# EAGLE board Traffic_Light_PCB (EAGLE 8.1.1)
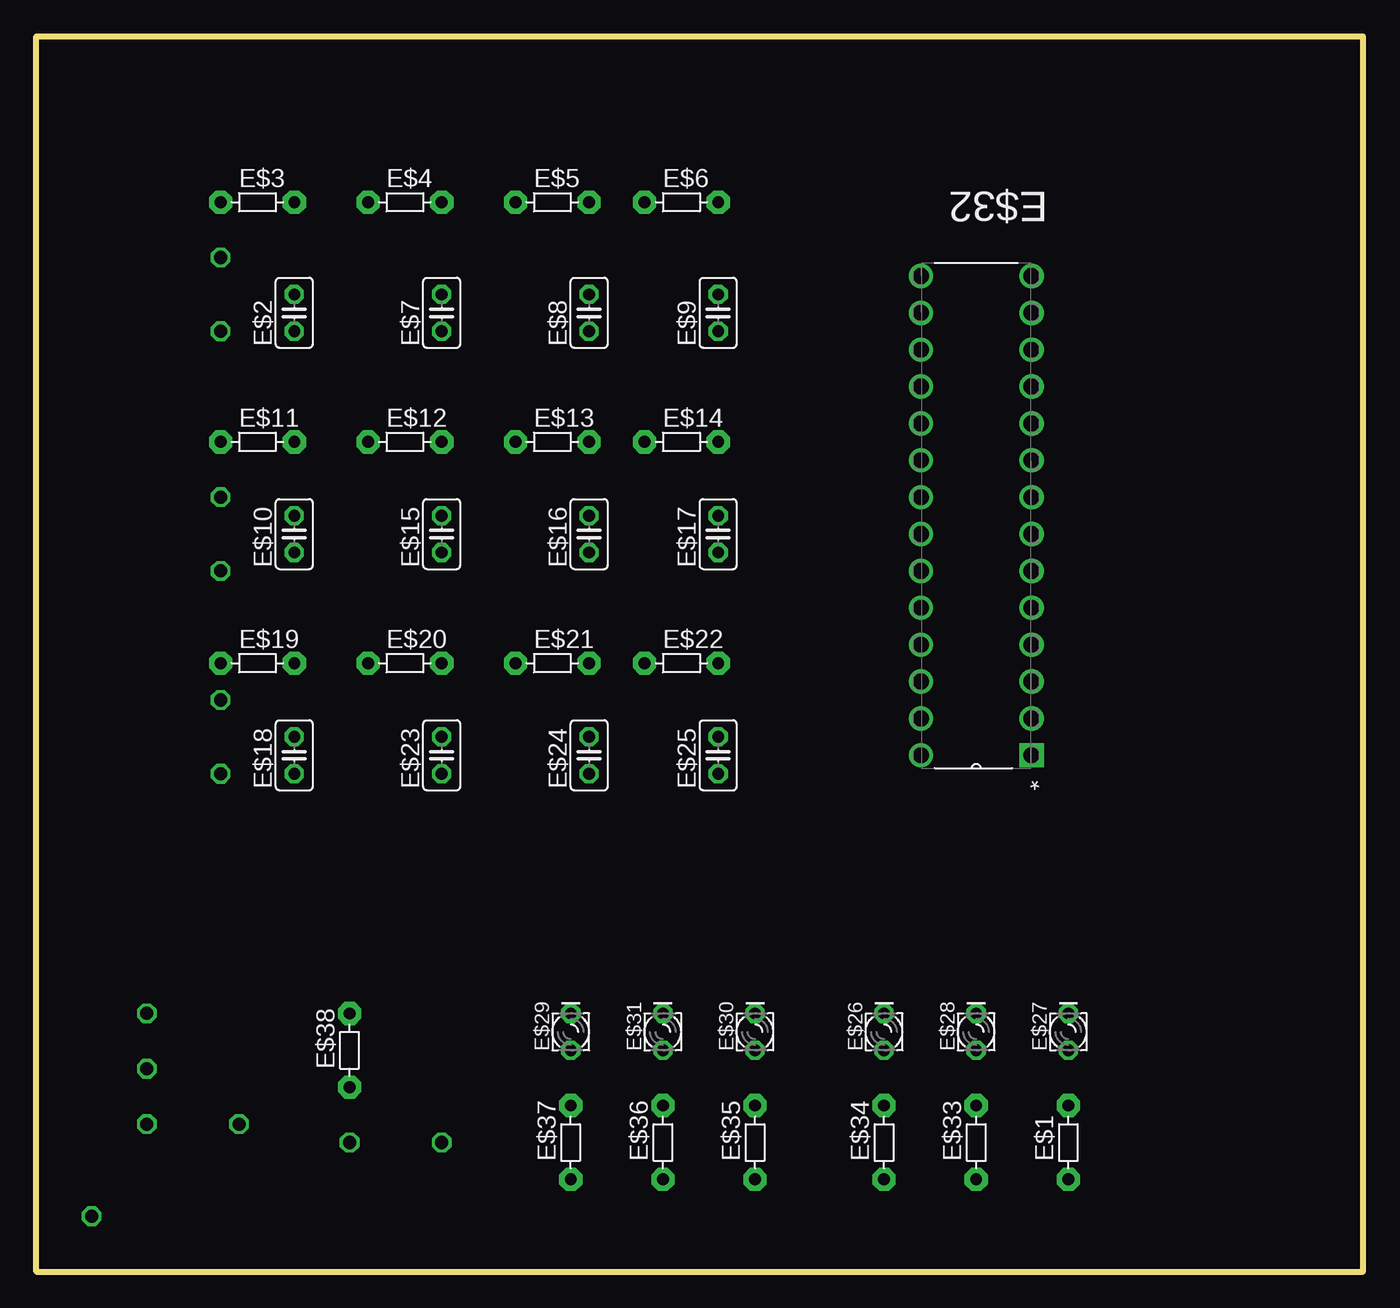
[diagram p0: board, top side]
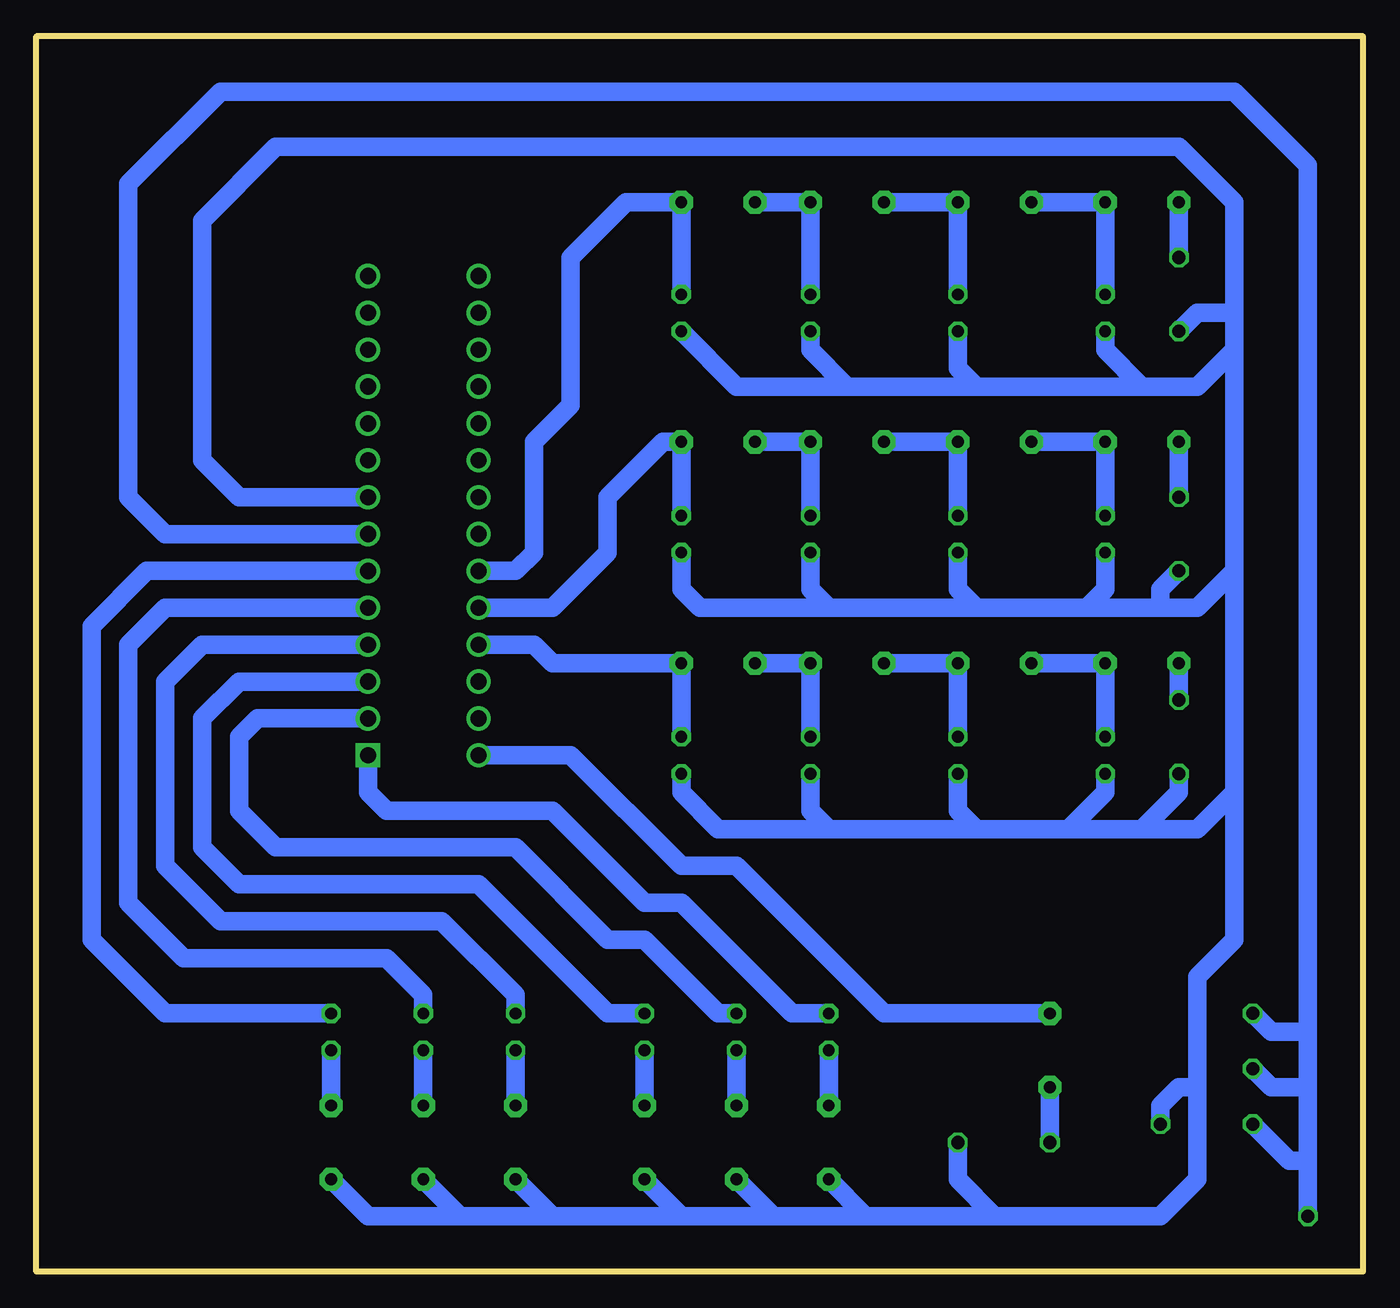
[diagram p1: board, bottom side, seen from below]

Size 91.44 x 85.09 mm. Coordinates in mm from the lower left corner, seen from the top.
Outline: 0,0 0,85.09 91.44,85.09 91.44,0 0,0
Copper layers (1*16): Top 0.035mm / dielectric 1.5mm / Bottom 0.035mm
Design rules "default *": minimum track width 10mil, minimum drill 24mil, track to track 20mil, track to pad 20mil, pad to pad 8mil, via to via 8mil, smd to smd 8mil, copper to edge 40mil, drill to drill 8mil, minimum pad ring 10mil, minimum via ring 8mil, stop-mask expansion 4mil, vias tented up to drill 0mil, thermal gap 10mil

## Footprints (pad centres in the part's own frame; a part is rotated, then mirrored left to right if it is on the bottom)
R-5 = drill 0.813 pad 1.6 octagon: 1 -2.54,0; 2 2.54,0
C025-025X050 = drill 0.813 octagon: 1 -1.27,0; 2 1.27,0
LED_LD260 = drill 0.813 octagon: A -1.27,0; K 1.27,0
DIP254P762X457-28 = drill 1.118 square: 1 -7.62,33.02 | drill 1.118: 2 -7.62,30.48; 3 -7.62,27.94; 4 -7.62,25.4; 5 -7.62,22.86; 6 -7.62,20.32; 7 -7.62,17.78; 8 -7.62,15.24; 9 -7.62,12.7; 10 -7.62,10.16; 11 -7.62,7.62; 12 -7.62,5.08; 13 -7.62,2.54; 14 -7.62,0; 15 0,0; 16 0,2.54; 17 0,5.08; 18 0,7.62; 19 0,10.16; 20 0,12.7; 21 0,15.24; 22 0,17.78; 23 0,20.32; 24 0,22.86; 25 0,25.4; 26 0,27.94; 27 0,30.48; 28 0,33.02

## Placement (x,y rotation side)
E$1  [R-5]  71.12,8.89 90 top
E$2  [C025-025X050]  17.78,66.04 90 top
E$3  [R-5]  15.24,73.66 0 top
E$4  [R-5]  25.4,73.66 0 top
E$5  [R-5]  35.56,73.66 0 top
E$6  [R-5]  44.45,73.66 0 top
E$7  [C025-025X050]  27.94,66.04 90 top
E$8  [C025-025X050]  38.1,66.04 90 top
E$9  [C025-025X050]  46.99,66.04 90 top
E$10  [C025-025X050]  17.78,50.8 90 top
E$11  [R-5]  15.24,57.15 0 top
E$12  [R-5]  25.4,57.15 0 top
E$13  [R-5]  35.56,57.15 0 top
E$14  [R-5]  44.45,57.15 0 top
E$15  [C025-025X050]  27.94,50.8 90 top
E$16  [C025-025X050]  38.1,50.8 90 top
E$17  [C025-025X050]  46.99,50.8 90 top
E$18  [C025-025X050]  17.78,35.56 90 top
E$19  [R-5]  15.24,41.91 0 top
E$20  [R-5]  25.4,41.91 0 top
E$21  [R-5]  35.56,41.91 0 top
E$22  [R-5]  44.45,41.91 0 top
E$23  [C025-025X050]  27.94,35.56 90 top
E$24  [C025-025X050]  38.1,35.56 90 top
E$25  [C025-025X050]  46.99,35.56 90 top
E$26  [LED_LD260]  58.42,16.51 90 top
E$27  [LED_LD260]  71.12,16.51 90 top
E$28  [LED_LD260]  64.77,16.51 90 top
E$29  [LED_LD260]  36.83,16.51 90 top
E$30  [LED_LD260]  49.53,16.51 90 top
E$31  [LED_LD260]  43.18,16.51 90 top
E$32  [DIP254P762X457-28]  60.96,68.58 180 top
E$33  [R-5]  64.77,8.89 90 top
E$34  [R-5]  58.42,8.89 90 top
E$35  [R-5]  49.53,8.89 90 top
E$36  [R-5]  43.18,8.89 90 top
E$37  [R-5]  36.83,8.89 90 top
E$38  [R-5]  21.59,15.24 90 top

## Library data of the parts
E$1 E$3-E$6 E$11-E$14 E$19-E$22 E$33-E$38 = discrete
E$2 E$7-E$10 E$15-E$18 E$23-E$25 = rcl
E$26-E$31 = eagle-ltspice
E$32 = Atmel_By_element14_Batch_1-00

## Nets
S$2: E$2.2 E$3.2 E$4.1
S$3: E$4.2 E$5.1 E$7.2
S$4: E$5.2 E$6.1 E$8.2
S$5: E$6.2 E$9.2 E$32.23
S$6: E$10.2 E$11.2 E$12.1
S$7: E$12.2 E$13.1 E$15.2
S$8: E$13.2 E$14.1 E$16.2
S$9: E$14.2 E$17.2 E$32.24
S$12: E$18.2 E$19.2 E$20.1
S$13: E$20.2 E$21.1 E$23.2
S$14: E$21.2 E$22.1 E$24.2
S$15: E$22.2 E$25.2 E$32.25
S$17: E$11.1
S$18: E$19.1
S$20: E$27.K E$32.6
S$21: E$32.7
S$22: E$28.K E$32.5
S$25: E$26.K E$32.4
S$26: E$30.K E$32.3
S$27: E$29.A E$37.2
S$28: E$31.A E$36.2
S$29: E$30.A E$35.2
S$31: E$31.K E$32.2
S$33: E$29.K E$32.1
S$34: E$26.A E$34.2
S$35: E$28.A E$33.2
S$36: E$1.2 E$27.A
S$37: E$32.28 E$38.2
S$38: E$38.1
S$40: E$3.1
S$42: E$1.1 E$2.1 E$7.1 E$8.1 E$9.1 E$10.1 E$15.1 E$16.1 E$17.1 E$18.1 E$23.1 E$24.1 E$25.1 E$32.8 E$33.1 E$34.1 E$35.1 E$36.1 E$37.1

## Tracks (layer width: path | path; a pad name or v marks a point on that pad's centre or on a via)
S$2
  Bottom 1.27: E$4.1 E$3.2 E$2.2
S$3
  Bottom 1.27: E$5.1 E$4.2 E$7.2
S$4
  Bottom 1.27: E$6.1 E$5.2 E$8.2
S$5
  Bottom 1.27: E$9.2 E$6.2 50.8,73.66 54.61,69.85 54.61,59.69 57.15,57.15 57.15,49.53 58.42,48.26 E$32.23
S$6
  Bottom 1.27: E$12.1 E$11.2 E$10.2
S$7
  Bottom 1.27: E$13.1 E$12.2 E$15.2
S$8
  Bottom 1.27: E$14.1 E$13.2 E$16.2
S$9
  Bottom 1.27: E$17.2 E$14.2 48.26,57.15 52.07,53.34 52.07,49.53 55.88,45.72 E$32.24
S$12
  Bottom 1.27: E$20.1 E$19.2 E$18.2
S$13
  Bottom 1.27: E$21.1 E$20.2 E$23.2
S$14
  Bottom 1.27: E$22.1 E$21.2 E$24.2
S$15
  Bottom 0.406: E$22.2 48,41.91
  Bottom 1.27: E$25.2 E$22.2 55.88,41.91 57.15,43.18 E$32.25
S$17  (via drill 0.9)
  Bottom 1.27: v12.7,53.34 E$11.1
S$18  (via drill 0.9)
  Bottom 1.27: E$19.1 v12.7,39.37
S$20
  Bottom 1.27: E$32.6 83.82,48.26 87.63,44.45 87.63,22.86 82.55,17.78 E$27.K
S$21  (via drill 0.9)
  Bottom 1.27: v3.81,3.81 3.81,7.62 | 3.81,7.62 3.81,12.7 | 3.81,12.7 3.81,16.51 | 3.81,16.51 3.81,76.2 8.89,81.28 78.74,81.28 85.09,74.93 85.09,53.34 82.55,50.8 E$32.7 | 3.81,7.62 5.08,7.62 v7.62,10.16 | 3.81,12.7 6.35,12.7 v7.62,13.97 | 3.81,16.51 6.35,16.51 v7.62,17.78
S$22
  Bottom 1.27: E$28.K 64.77,19.05 67.31,21.59 81.28,21.59 85.09,25.4 85.09,43.18 82.55,45.72 E$32.5
S$25
  Bottom 1.27: E$26.K 58.42,19.05 63.5,24.13 78.74,24.13 82.55,27.94 82.55,40.64 80.01,43.18 E$32.4
S$26
  Bottom 1.27: E$30.K 52.07,17.78 60.96,26.67 77.47,26.67 80.01,29.21 80.01,38.1 77.47,40.64 E$32.3
S$27
  Bottom 1.27: E$37.2 E$29.A
S$28
  Bottom 1.27: E$31.A E$36.2
S$29
  Bottom 1.27: E$35.2 E$30.A
S$31
  Bottom 1.27: E$31.K 44.45,17.78 49.53,22.86 52.07,22.86 58.42,29.21 74.93,29.21 77.47,31.75 77.47,36.83 76.2,38.1 E$32.2
S$33
  Bottom 1.27: E$29.K 39.37,17.78 46.99,25.4 49.53,25.4 55.88,31.75 67.31,31.75 68.58,33.02 E$32.1
S$34
  Bottom 1.27: E$26.A E$34.2
S$35
  Bottom 1.27: E$33.2 E$28.A
S$36
  Bottom 1.27: E$1.2 E$27.A
S$37
  Bottom 1.27: E$38.2 33.02,17.78 43.18,27.94 46.99,27.94 54.61,35.56 E$32.28
S$38  (via drill 0.9)
  Bottom 1.27: E$38.1 v21.59,8.89
S$40  (via drill 0.9)
  Bottom 1.27: v12.7,69.85 E$3.1
S$42  (via drill 0.9)
  Bottom 0.406: E$16.1 38.1,47.25 arc-45 37.91,46.8 36.83,45.72 44.19,45.72 arc45 44.64,45.91 | E$15.1 27.94,47.25 arc-45 27.75,46.8 26.67,45.72 | E$10.1 17.78,47.25 arc45 17.97,46.8 19.05,45.72
  Bottom 1.27: E$17.1 46.99,46.99 45.72,45.72 36.83,45.72 | v12.7,64.77 11.43,66.04 8.89,66.04 | 15.24,60.96 11.43,60.96 8.89,63.5 | 15.24,60.96 26.67,60.96 | 26.67,60.96 35.56,60.96 | 35.56,60.96 43.18,60.96 E$9.1 | E$8.1 38.1,63.5 35.56,60.96 | E$7.1 27.94,62.23 26.67,60.96 | E$2.1 17.78,63.5 15.24,60.96 | 8.89,63.5 8.89,66.04 | 8.89,66.04 8.89,73.66 12.7,77.47 74.93,77.47 80.01,72.39 80.01,55.88 77.47,53.34 E$32.8 | 8.89,63.5 8.89,48.26 | 8.89,48.26 8.89,33.02 | 8.89,33.02 8.89,22.86 11.43,20.32 11.43,12.7 | 8.89,48.26 11.43,45.72 13.97,45.72 | 13.97,45.72 19.05,45.72 | 19.05,45.72 26.67,45.72 | 26.67,45.72 36.83,45.72 | E$15.1 27.94,46.99 26.67,45.72 | E$16.1 38.1,46.99 36.83,45.72 | E$10.1 17.78,46.99 19.05,45.72 | 13.97,45.72 13.97,46.99 v12.7,48.26 | 25.4,3.81 13.97,3.81 11.43,6.35 11.43,12.7 | 25.4,3.81 34.29,3.81 | 34.29,3.81 40.64,3.81 | 40.64,3.81 46.99,3.81 | 46.99,3.81 55.88,3.81 | 55.88,3.81 62.23,3.81 | 62.23,3.81 68.58,3.81 E$1.1 | E$33.1 62.23,3.81 | E$34.1 55.88,3.81 | E$35.1 46.99,3.81 | E$36.1 40.64,3.81 | E$37.1 34.29,3.81 | 11.43,12.7 12.7,12.7 13.97,11.43 v13.97,10.16 | v27.94,8.89 27.94,6.35 25.4,3.81 | 8.89,33.02 11.43,30.48 15.24,30.48 | 15.24,30.48 20.32,30.48 | 20.32,30.48 26.67,30.48 | 26.67,30.48 36.83,30.48 | 36.83,30.48 44.45,30.48 46.99,33.02 E$25.1 | E$24.1 38.1,31.75 36.83,30.48 | E$23.1 27.94,31.75 26.67,30.48 | E$18.1 17.78,33.02 20.32,30.48 | v12.7,34.29 12.7,33.02 15.24,30.48